# Altium PCB LEDArray8KeyRevB.PcbDoc (part 3 of 4)
Units mm, origin at the board's own origin, x right, y up, seen from the top; angles counter-clockwise.
Board outline 120 x 84.91 mm, 2 copper layers (Top Layer, Bottom Layer); 250 components, 219 nets, 891 pads, 234 vias.
Unrouted connection lines stored in the file: 34.
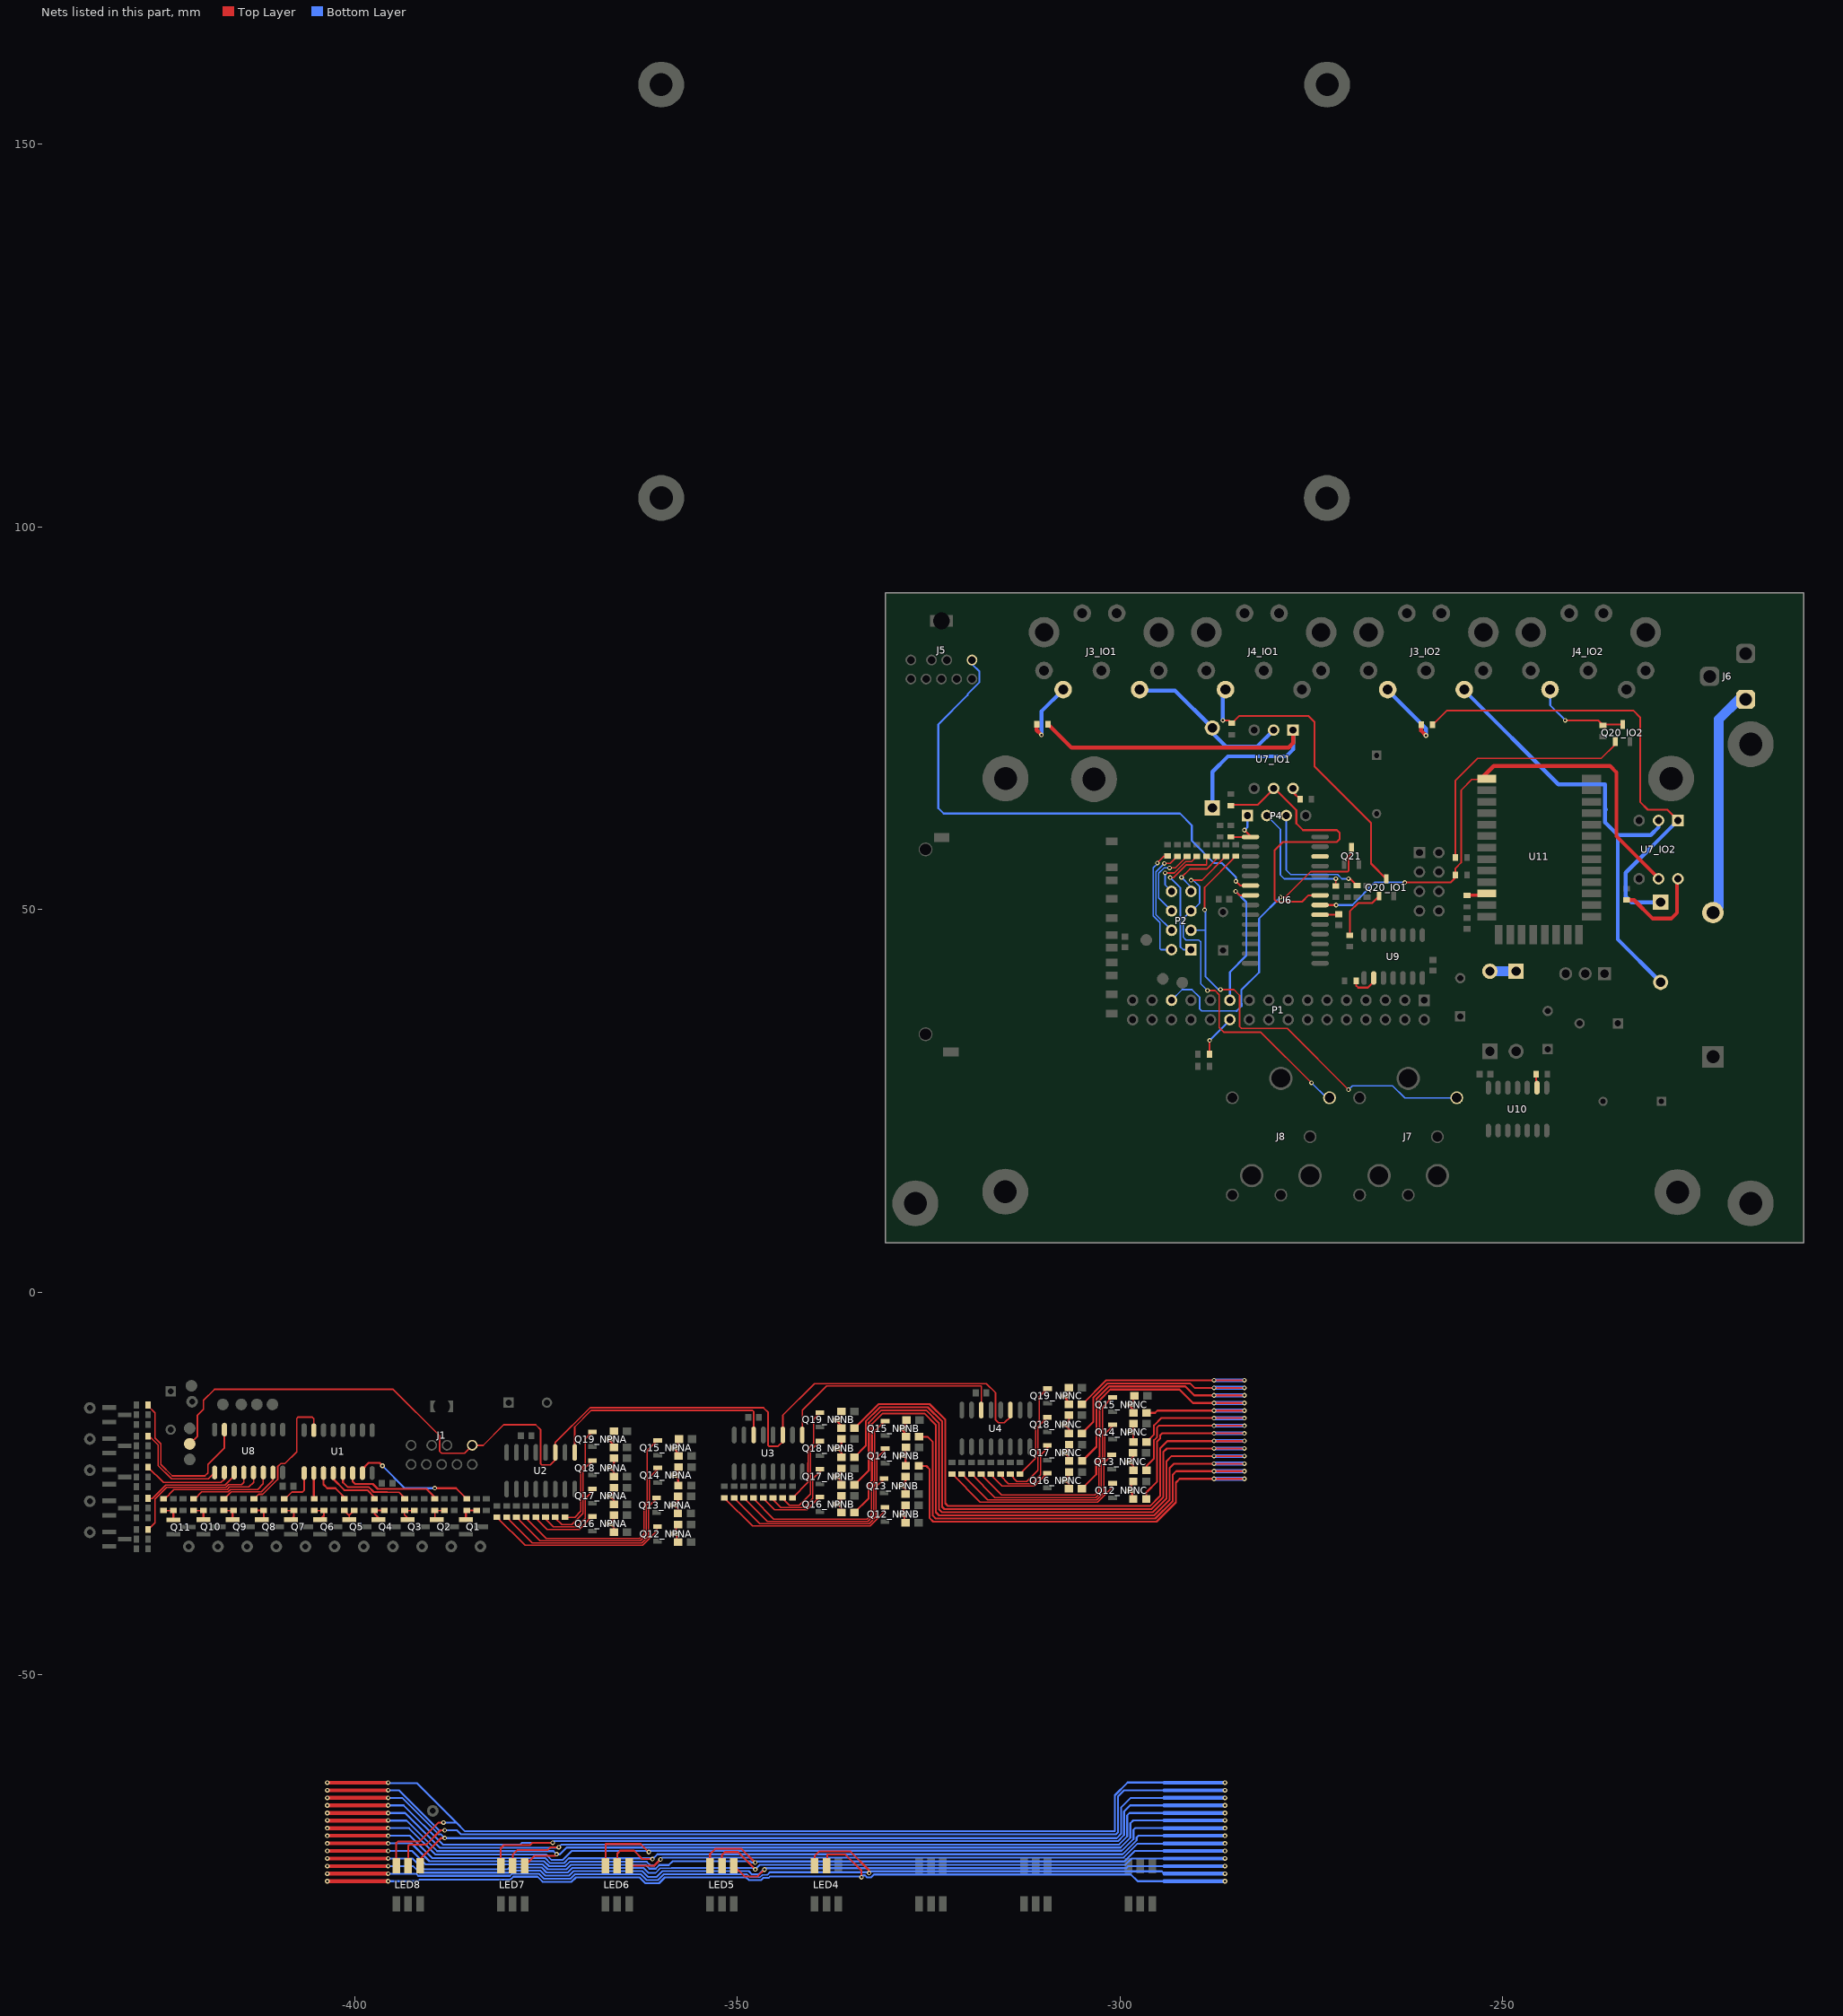
[diagram p3: the nets of this part, all layers, seen from the top]

## Via types
v1: diameter 0.6, hole 0.3, Top Layer to Bottom Layer, 234 vias

## Nets (pads, with @x,y where several pads share a name; then routed paths per layer and width w, separated by ;. In a path a pad name is that pad's centre, name@x,y a point inside that pad or via, vN(x,y) a via of type N, cw(c..) or ccw(c..) an arc to the next point about the centre after c; other vN are vias at no path point) (continued)
L11: LED4.4 R7_NPNB.1 | length 184.7
  Top Layer w0.254: LED4.4@-338.342,-74.93 -338.243,-74.831 -338.243,-73.474 -335.881,-73.474 -333.773,-75.582 v1(-333.773,-76.446) ; R7_NPNB.1@-326.275,-22.69 -326.311,-22.693 -325.293,-22.693 -324.857,-23.129 -324.857,-29.516 -324.41,-29.964 -295.215,-29.964 -292.703,-27.452 -292.703,-24.88 -292.195,-24.372 v1(-283.737,-24.372)
  Top Layer w0.5: v1(-403.561,-76.954) v1(-395.617,-76.954)
  Bottom Layer w0.254: v1(-395.617,-76.954) -391.735,-76.954 -391.507,-76.725 -379.611,-76.725 -379.255,-76.369 -376.087,-76.369 -375.43,-77.026 -371.639,-77.026 -371.059,-76.446 -362.753,-76.446 -361.995,-77.204 -360.21,-77.204 -359.452,-76.446 -348.841,-76.446 -348.485,-76.801 -346.868,-76.801 -346.563,-76.496 -346.26,-76.496 -346.235,-76.522 -345.898,-76.522 -345.695,-76.319 -333.9,-76.319 v1(-333.773,-76.446) -333.519,-76.192 -333.297,-76.192 -333.022,-76.466 -332.542,-76.466 -332.141,-76.065 -298.568,-76.065 -297.679,-76.954 -294.225,-76.954
  Bottom Layer w0.5: -294.225,-76.954 v1(-286.281,-76.954) ; v1(-287.709,-24.372) v1(-283.737,-24.372)
L12: LED4.2 R10_NPNB.1 | length 190.7
  Top Layer w0.254: LED4.2@-339.892,-74.93 -339.892,-73.649 -339.31,-73.067 -335.22,-73.067 -332.782,-75.505 v1(-332.782,-75.887) ; R10_NPNB.1@-326.319,-18.97 R10_NPNB.1@-326.319,-18.871 ; R10_NPNB.1@-326.264,-18.867 R10_NPNB.1@-326.319,-18.871 ; v1(-283.737,-23.381) -292.652,-23.381 -293.109,-23.838 -293.109,-27.283 -295.383,-29.557 -324.081,-29.557 -324.451,-29.188 -324.451,-19.571 -325.151,-18.871 R10_NPNB.1@-326.319,-18.871
  Top Layer w0.5: v1(-403.561,-75.963) v1(-395.617,-75.963)
  Bottom Layer w0.203: -349.419,-76.039 -348.709,-76.039 -348.328,-76.42 -347.026,-76.42 -346.721,-76.115 -346.066,-76.115
  Bottom Layer w0.254: v1(-395.617,-75.963) -391.954,-75.963 -391.675,-76.242 -379.703,-76.242 -379.424,-75.963 -375.918,-75.963 -375.262,-76.619 -371.808,-76.619 -371.227,-76.039 -362.585,-76.039 -361.827,-76.797 -360.378,-76.797 -359.62,-76.039 -349.419,-76.039 ; -346.066,-76.115 -345.736,-75.785 -332.884,-75.785 v1(-332.782,-75.887) -332.554,-75.658 -294.529,-75.658 -294.225,-75.963
  Bottom Layer w0.5: -294.225,-75.963 v1(-286.281,-75.963) ; v1(-287.709,-23.381) v1(-283.737,-23.381)
L13: LED5.6 R13_NPNB.1 | length 207.7
  Top Layer w0.254: LED5.6@-350.459,-74.93 -349.07,-76.319 -347.336,-76.319 v1(-346.447,-75.43) v1@-346.511,-75.366 ; R13_NPNB.1@-334.701,-28.78 -332.833,-26.913 -332.833,-25.018 -332.401,-24.586 -332.401,-17.222 -331.005,-15.825 -325.547,-15.825 -324.045,-17.328 -324.045,-28.745 -323.638,-29.151 -295.551,-29.151 -293.516,-27.115 -293.516,-22.975 -292.932,-22.391 v1(-283.737,-22.391)
  Top Layer w0.5: v1(-403.561,-74.972) v1(-395.617,-74.972)
  Bottom Layer w0.203: v1@-346.511,-75.366 v1@-346.393,-75.249
  Bottom Layer w0.254: v1(-395.617,-74.972) -392.37,-74.972 -391.507,-75.836 -379.871,-75.836 -379.592,-75.557 -375.75,-75.557 -375.094,-76.213 -371.976,-76.213 -371.396,-75.633 -362.417,-75.633 -361.659,-76.391 -360.547,-76.391 -359.789,-75.633 -348.504,-75.633 -348.098,-76.039 -347.184,-76.039 v1@-346.511,-75.366 ; v1@-346.393,-75.249 -299.177,-75.249 -298.901,-74.972 -294.225,-74.972
  Bottom Layer w0.5: -294.225,-74.972 v1(-286.281,-74.972) ; v1(-287.709,-22.391) v1(-283.737,-22.391)
L14: LED5.4 R16_NPNB.1 | length 207.1
  Top Layer w0.254: LED5.4@-352.009,-74.93 -352.009,-73.549 -351.603,-73.144 -350.232,-73.144 ; -350.232,-73.144 -349.901,-73.144 v1(-347.642,-75.404) ; R16_NPNB.1@-334.683,-25.163 -332.808,-23.288 -332.808,-17.054 -331.173,-15.419 -325.328,-15.419 -323.638,-17.108 -323.638,-28.364 -323.257,-28.744 -295.72,-28.744 -293.922,-26.947 -293.922,-22.086 -293.236,-21.4 v1(-283.737,-21.4)
  Top Layer w0.5: v1(-403.561,-73.982) v1(-395.617,-73.982)
  Bottom Layer w0.203: -361.613,-75.861 -360.661,-75.861 -360.051,-75.252 -358.614,-75.252 -358.589,-75.226
  Bottom Layer w0.254: v1(-395.617,-73.982) -392.417,-73.982 -390.999,-75.4 -380.01,-75.4 -379.76,-75.15 -375.582,-75.15 -374.925,-75.807 -372.144,-75.807 -371.564,-75.226 -362.248,-75.226 -361.613,-75.861 ; -358.589,-75.226 -347.819,-75.226 v1(-347.642,-75.404) -347.032,-74.795 -299.298,-74.795 -298.485,-73.982 -294.225,-73.982
  Bottom Layer w0.5: -294.225,-73.982 v1(-286.281,-73.982) ; v1(-287.709,-21.4) v1(-283.737,-21.4)
L15: LED5.2 R19_NPNB.1 | length 206.6
  Top Layer w0.254: LED5.2@-353.559,-74.93 -353.559,-73.397 -352.873,-72.712 -349.47,-72.712 v1(-347.667,-74.515) ; R19_NPNB.1@-334.701,-21.541 -333.214,-20.055 -333.214,-16.885 -331.341,-15.013 -325.099,-15.013 -323.232,-16.88 -323.232,-28.045 -322.938,-28.338 -295.888,-28.338 -294.329,-26.778 -294.329,-20.867 -293.871,-20.409 v1(-283.737,-20.409)
  Top Layer w0.5: v1(-403.561,-72.991) v1(-395.617,-72.991)
  Bottom Layer w0.254: v1(-395.617,-72.991) -392.497,-72.991 -390.745,-74.744 -375.413,-74.744 -374.757,-75.4 -372.313,-75.4 -371.732,-74.82 -361.982,-74.82 -361.494,-75.309 -360.661,-75.309 -360.198,-74.845 -358.944,-74.845 -358.436,-74.337 -348.276,-74.337 -348.098,-74.515 v1(-347.667,-74.515) -347.514,-74.363 -299.44,-74.363 -298.069,-72.991 -294.225,-72.991
  Bottom Layer w0.5: -294.225,-72.991 v1(-286.281,-72.991) ; v1(-287.709,-20.409) v1(-283.737,-20.409)
L16: LED6.6 R22_NPNB.1 | length 200.1
  Top Layer w0.254: LED6.6@-364.007,-75.049 LED6.6@-364.126,-74.93 -360.858,-74.93 v1(-360.036,-74.109) ; R22_NPNB.1@-334.701,-17.746 -334.701,-17.758 -334.662,-17.758 -331.51,-14.606 -324.87,-14.606 -322.825,-16.651 -322.825,-27.573 -322.467,-27.932 -296.056,-27.932 -294.735,-26.61 -294.735,-20.384 -293.808,-19.457 v1@-283.737,-19.457
  Top Layer w0.5: v1(-403.561,-72.001) v1(-395.617,-72.001)
  Bottom Layer w0.254: v1(-395.617,-72.001) -392.573,-72.001 -390.237,-74.337 -375.245,-74.337 -374.589,-74.994 -372.481,-74.994 -371.901,-74.414 -361.814,-74.414 -361.325,-74.902 -360.83,-74.902 v1(-360.036,-74.109) -359.782,-73.855 -299.507,-73.855 -297.691,-72.039 -294.225,-72.039
  Bottom Layer w0.5: -294.225,-72.039 v1@-286.281,-72.039 ; v1(-287.709,-19.419) v1(-283.737,-19.419)
  other v1: -286.281,-72.001
L17: LED6.4 R1_NPNC.1 | length 151.5
  Top Layer w0.254: LED6.4@-365.676,-74.93 -365.676,-73.347 -365.295,-72.966 -363.491,-72.966 -362.399,-74.058 v1(-361.078,-74.058) v1@-361.179,-73.956 ; R1_NPNC.1@-296.562,-26.992 -296.562,-26.151 -295.141,-24.731 -295.141,-19.486 -294.735,-19.079 -294.735,-18.688 -294.475,-18.428 v1(-283.737,-18.428)
  Top Layer w0.5: v1(-403.561,-71.01) v1(-395.617,-71.01)
  Bottom Layer w0.254: v1(-395.617,-71.01) -392.777,-71.01 -389.856,-73.931 -375.077,-73.931 -374.42,-74.587 -372.649,-74.587 -372.018,-73.956 v1@-361.179,-73.956 ; v1(-361.078,-74.058) -360.443,-73.423 -299.65,-73.423 -297.831,-71.604 -297.831,-71.239 -297.603,-71.01 -294.225,-71.01
  Bottom Layer w0.5: -294.225,-71.01 v1(-286.281,-71.01) ; v1(-287.709,-18.428) v1(-283.737,-18.428)
L18: LED6.2 R4_NPNC.1 | length 151.9
  Top Layer w0.254: LED6.2@-367.226,-74.93 -367.199,-74.903 -367.199,-72.077 -362.652,-72.077 -361.585,-73.144 v1(-361.56,-73.144) ; R4_NPNC.1@-296.55,-23.233 -296.55,-22.707 -295.548,-21.705 -295.548,-19.317 -295.141,-18.911 -295.141,-17.641 -294.936,-17.436 v1(-283.737,-17.438)
  Top Layer w0.5: v1(-403.561,-70.019) v1(-395.617,-70.019)
  Bottom Layer w0.254: v1(-395.617,-70.019) -392.904,-70.019 -389.475,-73.448 -374.985,-73.448 -374.252,-74.181 -372.818,-74.181 -371.628,-72.991 v1@-361.738,-72.991 ; v1(-361.56,-73.144) -361.383,-72.966 -299.768,-72.966 -298.238,-71.436 -298.238,-70.223 -298.035,-70.019 -294.225,-70.019
  Bottom Layer w0.5: -294.225,-70.019 v1(-286.281,-70.019) ; v1(-287.709,-17.438) v1(-283.737,-17.438)
L19: LED7.6 R7_NPNC.1 | length 145.7
  Top Layer w0.254: LED7.6@-377.793,-74.93 -376.514,-73.652 -373.828,-73.652 v1(-373.6,-73.423) ; R7_NPNC.1@-296.536,-19.576 -296.58,-19.587 -295.548,-18.555 -295.548,-17.387 -294.581,-16.42 ; -294.581,-16.433 v1@-283.737,-16.433
  Top Layer w0.5: v1@-403.561,-69.029 v1@-395.617,-69.029
  Bottom Layer w0.254: v1(-395.617,-69.003) -395.617,-69.029 -393.208,-69.029 -389.221,-73.017 -374.006,-73.017 v1(-373.6,-73.423) -373.168,-73.423 -372.305,-72.559 -299.936,-72.559 -298.644,-71.267 -298.644,-69.384 -298.263,-69.003 -294.225,-69.003
  Bottom Layer w0.5: -294.225,-69.003 v1(-286.281,-69.003) ; v1@-287.709,-16.461 v1@-283.737,-16.461
  other v1: -403.561,-69.003 -287.709,-16.447 -283.737,-16.447
L20: LED7.4 R10_NPNC.1 | length 147.6
  Top Layer w0.254: LED7.4@-379.343,-74.93 -379.343,-73.502 -378.705,-72.864 -374.743,-72.864 -374.387,-72.509 v1(-373.321,-72.509) v1@-373.397,-72.585 ; R10_NPNC.1@-296.58,-15.856 R10_NPNC.1@-296.58,-15.757 ; R10_NPNC.1@-296.525,-15.753 R10_NPNC.1@-296.58,-15.757 ; v1(-283.737,-15.456) -295.109,-15.455 -295.412,-15.757 R10_NPNC.1@-296.58,-15.757
  Top Layer w0.5: v1(-403.561,-68.038) v1(-395.617,-68.038)
  Bottom Layer w0.254: v1(-395.617,-68.038) -393.386,-68.038 -388.84,-72.585 v1@-373.397,-72.585 ; v1(-373.321,-72.509) -372.965,-72.153 -300.104,-72.153 -299.051,-71.099 -299.051,-68.343 -298.746,-68.038 -294.225,-68.038
  Bottom Layer w0.5: -294.225,-68.038 v1(-286.281,-68.038) ; v1(-287.709,-15.456) v1(-283.737,-15.456)
L21: LED7.2 R13_NPNC.1 | length 169.5
  Top Layer w0.254: -380.915,-72.61 -380.893,-72.632 ; LED7.2@-380.893,-74.93 -380.893,-72.632 ; v1(-374.108,-71.924) -376.739,-71.924 -377.054,-72.24 -380.5,-72.24 -380.893,-72.632 ; R13_NPNC.1@-304.962,-25.666 -303.094,-23.799 -303.094,-21.904 -302.662,-21.472 -302.662,-14.108 -301.266,-12.711 -292.222,-12.711 -290.468,-14.466 v1(-283.737,-14.466)
  Top Layer w0.5: v1(-403.561,-67.048) v1(-395.617,-67.048)
  Bottom Layer w0.254: v1(-395.617,-67.048) -393.589,-67.048 -388.459,-72.178 -378.375,-72.178 -378.121,-71.924 v1(-374.108,-71.924) -373.905,-71.721 -300.247,-71.721 -299.457,-70.931 -299.457,-67.835 -298.67,-67.048 -294.225,-67.048
  Bottom Layer w0.5: -294.225,-67.048 v1(-286.281,-67.048) ; v1(-287.709,-14.466) v1(-283.737,-14.466)
L22: LED8.6 R16_NPNC.1 | length 162.2
  Top Layer w0.254: LED8.6@-391.46,-74.93 -391.46,-74.062 -388.713,-71.315 v1(-388.23,-71.315) ; R16_NPNC.1@-304.944,-22.049 -303.069,-20.174 -303.069,-13.94 -301.434,-12.305 -291.465,-12.305 -290.295,-13.475 v1(-283.737,-13.475)
  Top Layer w0.5: v1(-403.561,-66.057) v1(-395.617,-66.057)
  Bottom Layer w0.254: v1(-395.617,-66.057) -393.793,-66.057 -389.043,-70.807 -388.738,-70.807 v1(-388.23,-71.315) -300.416,-71.315 -299.863,-70.762 -299.863,-67.327 -298.593,-66.057 -294.225,-66.057
  Bottom Layer w0.5: -294.225,-66.057 v1(-286.281,-66.057) ; v1(-287.709,-13.475) v1(-283.737,-13.475)
L23: LED8.4 R19_NPNC.1 | length 163
  Top Layer w0.254: LED8.4@-393.01,-74.93 -393.005,-74.926 -393.005,-72.356 -392.802,-72.153 -390.618,-72.153 -388.763,-70.299 v1(-388.23,-70.299) ; R19_NPNC.1@-304.962,-18.427 -303.475,-16.941 -303.475,-13.771 -301.602,-11.899 -290.83,-11.899 -290.244,-12.485 v1(-283.737,-12.485)
  Top Layer w0.5: v1(-403.561,-65.066) v1(-395.617,-65.066)
  Bottom Layer w0.254: v1(-395.617,-65.066) -394.208,-65.066 -388.976,-70.299 v1(-388.23,-70.299) -386.63,-70.299 -386.097,-70.832 -300.508,-70.832 -300.27,-70.594 -300.27,-65.895 -299.441,-65.066 -294.225,-65.066
  Bottom Layer w0.5: -294.225,-65.066 v1(-286.281,-65.066) ; v1(-287.709,-12.485) v1(-283.737,-12.485)
L24: LED8.2 R22_NPNC.1 | length 163.8
  Top Layer w0.254: LED8.2@-394.56,-74.93 -394.56,-72.006 -394.301,-71.747 -391.506,-71.747 -389.042,-69.283 v1(-388.383,-69.283) ; R22_NPNC.1@-304.962,-14.622 -304.962,-14.644 -304.923,-14.644 -301.771,-11.492 v1(-283.737,-11.494)
  Top Layer w0.5: v1(-403.561,-64.076) v1(-395.617,-64.076)
  Bottom Layer w0.254: v1(-395.617,-64.076) -395.617,-64.127 -391.862,-64.127 -386.706,-69.283 ; v1(-388.383,-69.283) -386.706,-69.283 ; -294.225,-64.076 -294.25,-64.05 -299,-64.05 -300.676,-65.727 -300.676,-70.426 -385.563,-70.426 -386.706,-69.283
  Bottom Layer w0.5: -294.225,-64.076 v1(-286.281,-64.076) ; v1(-287.709,-11.494) v1(-283.737,-11.494)
L_OUT: U6.26
LAT: J1.6 J5.6 pad.0@-421.538,-19.812 U2.11 U3.11 U4.11 U6.6 | length 211.8
  Top Layer w0.203: pad.0@-421.538,-19.812 -420.522,-18.796 -420.522,-16.047 -419.754,-15.278 -419.754,-14.129 -418.313,-12.688 -394.954,-12.688 -388.863,-18.779 -388.872,-18.788 -388.872,-19.595 -388.876,-19.599 -388.876,-20.784 -388.637,-21.023 -385.647,-21.023 J1.6@-384.622,-19.998 -383.192,-19.998 -380.509,-17.314 -376.343,-17.314 -375.683,-17.975 -375.683,-22.42 -375.556,-22.547 -374.413,-22.547 -373.778,-21.912 U2.11@-373.778,-20.919 -373.778,-19.631 -369.226,-15.079 -346.574,-15.079 -345.965,-15.689 -345.965,-20.007 -345.838,-20.134 -344.695,-20.134 -344.049,-19.488 U3.11@-344.049,-18.647 -344.049,-16.059 -339.92,-11.93 -317.462,-11.93 -316.247,-13.145 -316.247,-16.705 -315.894,-17.057 -315.104,-17.057 -314.313,-16.267 U4.11@-314.313,-15.381
  Top Layer w0.254: v1(-284.852,53.704) -284.294,53.145 U6.6@-282.951,53.145
  Bottom Layer w0.254: J5.6@-319.329,82.618 -319.33,82.077 -318.35,81.098 -318.35,79.713 -319.902,78.16 -319.902,78.037 -323.74,74.2 -323.74,63.247 -323.044,62.551 -292.156,62.551 -290.618,61.013 -290.618,59.013 -287.672,56.066 -286.656,56.066 -284.852,54.263 v1(-284.852,53.704)
LCD_WR: P1.21 U6.7 | length 17.8
  Top Layer w0.254: v1(-284.878,52.383) -284.37,51.875 U6.7@-282.951,51.875
  Bottom Layer w0.254: P1.21@-285.64,38.159 -285.64,41.842 -283.481,44.001 -283.481,50.986 v1(-284.878,52.383)
MCLR: P4.1 R58.1 U6.1 | length 5.8
  Top Layer w0.254: R58.1@-285.513,59.507 -285.501,59.495 U6.1@-282.951,59.495 -282.951,59.6 v1(-283.735,60.384)
  Bottom Layer w0.254: v1(-283.735,60.384) -283.354,60.765 P4.1@-283.354,62.289
NetC9_2: C9.2 U6.20 | length 2.5
  Top Layer w0.254: U6.20@-273.851,49.335 -271.481,49.335 C9.2@-271.416,49.4
NetD1_2: D1.2 D2.1 | length 3.4
  Bottom Layer w1.27: D2.1@-251.669,41.95 D1.2@-248.24,41.95
NetD3_IO1_1: D3_IO1.1 J3_IO1.5 U7_IO1.2 | length 22.1
  Bottom Layer w0.508: J3_IO1.5@-297.422,78.745 -297.549,78.618 -292.802,78.618 D3_IO1.1@-287.926,73.742 -287.926,73.084 -286.148,71.306 -282.084,71.306 U7_IO1.2@-279.925,73.465
NetD3_IO1_2: D3_IO1.2 R63_IO1.2 U7_IO1.1 | length 54.2
  Top Layer w0.508: R63_IO1.2@-309.386,74.227 -306.338,71.179 -277.963,71.179 -277.385,71.758 U7_IO1.1@-277.385,73.465
  Bottom Layer w0.508: D3_IO1.2@-287.926,63.282 -287.926,68.004 -285.894,70.036 -278.274,70.036 -277.385,70.925 U7_IO1.1@-277.385,73.465
NetD3_IO2_1: D3_IO2.1 J3_IO2.5 U7_IO2.2 | length 59
  Bottom Layer w0.508: J3_IO2.5@-254.992,78.64 -242.729,66.376 -236.618,66.376 -236.618,63.201 -236.491,63.074 ; -236.618,63.074 -236.618,61.4 -234.967,59.749 ; U7_IO2.2@-229.633,61.654 -229.633,60.765 -230.649,59.749 -234.967,59.749 ; D3_IO2.1@-229.362,40.508 -234.967,46.112 -234.967,59.749
NetD3_IO2_2: D3_IO2.2 R63_IO2.2 U7_IO2.1 | length 62.9
  Top Layer w0.254: R63_IO2.2@-259.141,74.154 -257.272,76.024 -232.935,76.024 -232.046,75.135 -232.046,64.067 -231.03,63.051 -228.49,63.051 U7_IO2.1@-227.093,61.654
  Bottom Layer w0.508: D3_IO2.2@-229.362,50.968 -233.162,50.968 -233.934,51.74 -233.934,54.813 U7_IO2.1@-227.093,61.654
NetD5_1: D5.1 J6.1 | length 30.2
  Bottom Layer w1.27: D5.1@-222.521,49.611 -221.759,50.373 -221.759,74.862 -219.145,77.476 J6.1@-218.253,77.476
NetJ3_IO1_4: J3_IO1.4 R63_IO1.1 | length 8.7
  Top Layer w0.508: R63_IO1.1@-310.887,74.227 -310.887,73.453 v1(-310.263,72.83)
  Bottom Layer w0.508: v1(-310.263,72.83) -310.263,75.904 J3_IO1.4@-307.422,78.745
NetJ3_IO2_4: J3_IO2.4 R63_IO2.1 | length 9.7
  Top Layer w0.508: R63_IO2.1@-260.641,74.154 -260.641,73.38 v1(-260.018,72.757)
  Bottom Layer w0.508: J3_IO2.4@-265.019,78.745 -264.993,78.64 -260.018,73.666 v1(-260.018,72.757)
NetJ4_IO1_4: J4_IO1.4 Q20_IO1.1 R64_IO1.1 | length 41.4
  Top Layer w0.254: v1(-286.554,74.735) -285.779,74.735 R64_IO1.1@-285.386,74.342 -284.405,75.323 -275.405,75.323 -274.563,74.481 -274.563,68.677 -267.199,61.313 -267.199,56.023 Q20_IO1.1@-265.193,54.016
  Bottom Layer w0.508: v1(-286.554,74.735) -286.554,78.404 J4_IO1.4@-286.213,78.745
NetJ4_IO2_4: J4_IO2.4 Q20_IO2.1 R64_IO2.1 | length 13
  Top Layer w0.254: v1(-241.825,74.735) -237.531,74.735 R64_IO2.1@-236.884,74.088 -236.763,74.209 Q20_IO2.1@-234.332,74.209
  Bottom Layer w0.254: J4_IO2.4@-244.085,78.339 -243.784,78.64 -243.784,76.694 v1(-241.825,74.735)
NetJ7_TIP: J7.TIP P2.3 R66.1 | length 62.2
  Top Layer w0.203: v1(-288.942,49.97) -288.942,52.901 R66.1@-284.856,56.987 ; v1(-286.861,39.56) -285.136,39.56 -284.37,38.794 -284.37,34.73 -284.116,34.476 -278.147,34.476 v1(-270.146,26.475)
  Bottom Layer w0.203: P2.3@-290.72,47.303 -288.815,47.303 ; v1(-288.942,49.97) -288.815,49.843 -288.815,47.303 ; v1(-286.861,39.56) -287.168,39.56 -288.815,41.207 -288.815,47.303 ; v1(-270.146,26.475) -269.638,26.983 -264.38,26.983 -262.78,25.383 J7.TIP@-255.414,25.383
NetJ8_TIP: J8.TIP P2.5 R67.1 | length 49
  Top Layer w0.203: v1(-290.703,53.848) -289.267,53.848 R67.1@-286.148,56.967 ; v1(-288.561,39.429) -287.574,39.429 -287.037,38.892 -287.037,34.603 -286.402,33.968 -281.576,33.968 v1(-274.972,27.364)
  Bottom Layer w0.203: v1(-290.703,53.848) -290.432,53.848 -289.577,52.993 -289.577,50.859 -290.593,49.843 P2.5@-290.72,49.843 -291.736,48.827 -291.736,46.414 -291.355,46.033 -289.704,46.033 -289.45,45.779 -289.45,40.318 v1(-288.561,39.429) ; v1(-274.972,27.364) -272.991,25.383 J8.TIP@-272.051,25.383
NetP1_27: P1.27 Q21.1 | length 42.1
  Top Layer w0.203: v1(-279.036,51.621) -278.432,51.621 -275.084,54.969 -270.201,54.969 -270.129,55.041 -270.129,56.957 -269.748,57.338 Q21.1@-269.748,58.116
  Top Layer w0.254: v1(-279.036,51.621) v1@-279.036,51.748
  Bottom Layer w0.203: P1.27@-293.26,38.159 -291.868,39.551 -290.593,39.551 -289.577,38.535 -289.577,37.016 -289.323,36.762 -284.751,36.762
  Bottom Layer w0.254: -284.751,36.762 -284.116,37.397 -284.116,37.719 -284.129,37.733 -284.129,39.504 -281.83,41.803 -281.83,48.827 v1(-279.036,51.621)
NetP2_1: P2.1 R68.2 | length 17.7
  Top Layer w0.203: v1(-293.438,54.187) -293.011,54.187 -291.362,55.835 -288.688,55.835 R68.2@-288.688,56.979
  Bottom Layer w0.203: v1(-293.438,54.187) -292.269,53.018 -292.244,53.018 -292.117,52.891 -292.117,45.144 -291.736,44.763 P2.1@-290.72,44.763
NetP2_2: P2.2 R70.2 | length 15.2
  Top Layer w0.203: v1@-295.038,56.066 v1(-295.114,56.092) -294.238,56.967 -293.768,56.967 R70.2@-293.768,56.993
  Bottom Layer w0.203: v1@-295.038,56.066 -295.647,55.457 -295.647,49.188 -294.784,48.324 -294.784,44.89 -294.657,44.763 P2.2@-293.26,44.763
NetP2_4: P2.4 R71.2 | length 12.1
  Top Layer w0.203: v1(-294.2,56.041) -293.436,56.041 R71.2@-292.498,56.979
  Bottom Layer w0.203: v1(-294.2,56.041) -295.292,54.949 -295.292,49.335 P2.4@-293.26,47.303
NetP2_6: P2.6 R72.2 | length 10.2
  Top Layer w0.203: v1(-293.514,55.457) -292.75,55.457 R72.2@-291.228,56.979
  Bottom Layer w0.203: v1(-293.514,55.457) -294.225,55.457 -294.936,54.745 -294.936,51.52 P2.6@-293.26,49.843
NetP2_7: P2.7 R69.1 | length 8.3
  Top Layer w0.203: v1(-291.964,54.212) -290.872,55.304 -288.688,55.304 -287.418,56.574 R69.1@-287.418,56.979
  Bottom Layer w0.203: v1(-291.964,54.212) -290.72,52.967 P2.7@-290.72,52.383
NetP2_8: P2.8 R73.2 | length 7.8
  Top Layer w0.203: v1(-294.098,54.796) -292.904,54.796 -291.406,56.295 -290.642,56.295 R73.2@-289.958,56.979
  Bottom Layer w0.203: v1(-294.098,54.796) -294.098,53.221 P2.8@-293.26,52.383
NetQ1_1: Q1.1 R25.2 R36.2 | length 2.5
  Top Layer w0.254: Q1.1@-385.446,-29.699 -385.446,-28.615 R25.2@-385.335,-28.504 R36.2@-384.065,-28.504
NetQ2_1: Q2.1 R26.2 R37.2 | length 2.6
  Top Layer w0.152: Q2.1@-389.256,-29.699 -389.526,-29.43 R26.2@-389.526,-28.504 R37.2@-388.256,-28.504
NetQ3_1: Q3.1 R27.2 R38.2 | length 2.6
  Top Layer w0.152: Q3.1@-393.066,-29.699 -393.066,-29.445 -393.463,-29.049 R27.2@-393.463,-28.504 R38.2@-392.193,-28.504
NetQ4_1: Q4.1 R28.2 R39.2 | length 2.7
  Top Layer w0.254: Q4.1@-396.876,-29.699 -396.876,-29.445 -397.4,-28.922 R28.2@-397.4,-28.504 R39.2@-396.13,-28.504
NetQ5_1: Q5.1 R29.2 R40.2 | length 2.4
  Top Layer w0.152: R29.2@-401.337,-28.504 -400.686,-29.155 ; Q5.1@-400.686,-29.699 -400.686,-29.155 ; R40.2@-400.067,-28.504 -400.686,-29.123 -400.686,-29.155
NetQ6_1: Q6.1 R30.2 R41.2 | length 2.7
  Top Layer w0.152: R30.2@-405.274,-28.504 R41.2@-404.004,-28.504
  Top Layer w0.254: Q6.1@-404.496,-29.699 -404.004,-29.207 R41.2@-404.004,-28.504
NetQ7_1: Q7.1 R31.2 R42.2 | length 2.6
  Top Layer w0.152: R31.2@-409.211,-28.504 R42.2@-407.941,-28.504
  Top Layer w0.254: Q7.1@-408.306,-29.699 -407.941,-29.334 R42.2@-407.941,-28.504
NetQ8_1: Q8.1 R32.2 R43.2 | length 2.6
  Top Layer w0.254: R32.2@-413.148,-28.504 R43.2@-411.878,-28.504 -411.878,-29.461 Q8.1@-412.116,-29.699
NetQ9_1: Q9.1 R33.2 R44.2 | length 2.5
  Top Layer w0.152: R33.2@-417.085,-28.504 R44.2@-415.815,-28.504
  Top Layer w0.254: Q9.1@-415.926,-29.699 -415.926,-28.615 R44.2@-415.815,-28.504
NetQ10_1: Q10.1 R34.2 R45.2 | length 2.5
  Top Layer w0.152: R34.2@-421.022,-28.504 R45.2@-419.752,-28.504
  Top Layer w0.254: R45.2@-419.752,-28.504 -419.736,-28.52 Q10.1@-419.736,-29.699
NetQ11_1: Q11.1 R35.2 R46.2 | length 2.5
  Top Layer w0.152: R35.2@-424.959,-28.504 R46.2@-423.689,-28.504
  Top Layer w0.254: R46.2@-423.689,-28.504 -423.673,-28.52 Q11.1@-423.673,-29.725
NetQ12_NPNA_1: Q12_NPNA.1 R1_NPNA.2 R2_NPNA.2 | length 2.6
  Top Layer w0.254: R2_NPNA.2@-357.991,-30.294 -357.991,-31.38 Q12_NPNA.1@-358.175,-31.564 -357.864,-31.875 R1_NPNA.2@-357.864,-32.707
NetQ12_NPNA_2: Q12_NPNA.2 R3_NPNA.2 | length 24
  Top Layer w0.152: R3_NPNA.2@-381.398,-29.403 -377.727,-33.075 -362.377,-33.075 -360.475,-31.172 -360.475,-30.564 -360.425,-30.514 Q12_NPNA.2@-360.425,-30.614
NetQ12_NPNB_1: Q12_NPNB.1 R1_NPNB.2 R2_NPNB.2 | length 2.6
  Top Layer w0.254: R2_NPNB.2@-328.273,-27.754 -328.273,-28.84 Q12_NPNB.1@-328.457,-29.024 -328.146,-29.335 R1_NPNB.2@-328.146,-30.167
NetQ12_NPNB_2: Q12_NPNB.2 R3_NPNB.2 | length 24
  Top Layer w0.152: R3_NPNB.2@-351.68,-26.863 -348.009,-30.535 -332.659,-30.535 -330.757,-28.632 -330.757,-28.024 -330.707,-27.974 Q12_NPNB.2@-330.707,-28.074
NetQ12_NPNC_1: Q12_NPNC.1 R1_NPNC.2 R2_NPNC.2 | length 2.6
  Top Layer w0.254: R2_NPNC.2@-298.534,-24.64 -298.534,-25.726 Q12_NPNC.1@-298.718,-25.91 -298.407,-26.221 R1_NPNC.2@-298.407,-27.053
NetQ12_NPNC_2: Q12_NPNC.2 R3_NPNC.2 | length 24
  Top Layer w0.152: R3_NPNC.2@-321.941,-23.75 -318.27,-27.421 -302.921,-27.421 -301.018,-25.518 -301.018,-24.91 -300.968,-24.86 Q12_NPNC.2@-300.968,-24.96
NetQ13_NPNA_1: Q13_NPNA.1 R4_NPNA.2 R5_NPNA.2 | length 3
  Top Layer w0.254: R4_NPNA.2@-357.758,-29.09 -357.758,-28.897 R4_NPNA.2@-357.758,-28.639 ; R4_NPNA.2@-357.737,-28.836 -357.737,-28.319 -358.26,-27.796 -358.302,-27.754 -357.737,-27.189 R5_NPNA.2@-357.737,-26.738
NetQ13_NPNA_2: Q13_NPNA.2 R6_NPNA.2 | length 25.9
  Top Layer w0.152: R6_NPNA.2@-380.128,-29.403 -376.761,-32.77 -362.504,-32.77 -361.586,-31.852 -361.586,-27.992 -360.499,-26.905 -360.425,-26.831 Q13_NPNA.2@-360.534,-26.87
NetQ13_NPNB_1: Q13_NPNB.1 R4_NPNB.2 R5_NPNB.2 | length 3.2
  Top Layer w0.254: R4_NPNB.2@-328.04,-26.55 -328.04,-26.357 -328.04,-26.099 -328.019,-26.296 -328.019,-25.779 -328.542,-25.256 -328.584,-25.214 -328.019,-24.649 R5_NPNB.2@-328.019,-24.198
NetQ13_NPNB_2: Q13_NPNB.2 R6_NPNB.2 | length 25.9
  Top Layer w0.152: R6_NPNB.2@-350.41,-26.863 -347.043,-30.23 -332.786,-30.23 -331.868,-29.312 -331.868,-25.452 -330.781,-24.365 -330.707,-24.291 Q13_NPNB.2@-330.816,-24.33
NetQ13_NPNC_1: Q13_NPNC.1 R4_NPNC.2 R5_NPNC.2 | length 2.6
  Top Layer w0.254: R5_NPNC.2@-298.28,-21.084 -298.28,-21.535 -298.845,-22.1 -298.28,-22.665 -298.28,-23.182 R4_NPNC.2@-298.25,-23.233
NetQ13_NPNC_2: Q13_NPNC.2 R6_NPNC.2 | length 25.9
  Top Layer w0.152: R6_NPNC.2@-320.671,-23.75 -317.304,-27.116 -303.047,-27.116 -302.129,-26.198 -302.129,-22.338 -301.042,-21.251 -300.968,-21.177 Q13_NPNC.2@-301.077,-21.216
NetQ14_NPNA_1: Q14_NPNA.1 R7_NPNA.2 R8_NPNA.2 | length 2.4
  Top Layer w0.254: R8_NPNA.2@-357.737,-23.055 -357.737,-25.341 R7_NPNA.2@-357.693,-25.23
NetQ14_NPNA_2: Q14_NPNA.2 R9_NPNA.2 | length 27.7
  Top Layer w0.152: R9_NPNA.2@-378.858,-29.403 -375.796,-32.465 -362.63,-32.465 -361.891,-31.726 -361.891,-27.832 -361.459,-27.4 -361.459,-24.182 Q14_NPNA.2@-360.425,-23.148
NetQ14_NPNB_1: Q14_NPNB.1 R7_NPNB.2 R8_NPNB.2 | length 2.4
  Top Layer w0.254: R8_NPNB.2@-328.019,-20.515 -328.019,-22.801 R7_NPNB.2@-327.975,-22.69
NetQ14_NPNB_2: Q14_NPNB.2 R9_NPNB.2 | length 27.7
  Top Layer w0.152: R9_NPNB.2@-349.14,-26.863 -346.078,-29.925 -332.912,-29.925 -332.173,-29.186 -332.173,-25.292 -331.741,-24.86 -331.741,-21.642 Q14_NPNB.2@-330.707,-20.608
NetQ14_NPNC_1: Q14_NPNC.1 R7_NPNC.2 R8_NPNC.2 | length 2.4
  Top Layer w0.254: R8_NPNC.2@-298.28,-17.401 -298.28,-19.687 R7_NPNC.2@-298.236,-19.576
NetQ14_NPNC_2: Q14_NPNC.2 R9_NPNC.2 | length 27.7
  Top Layer w0.152: R9_NPNC.2@-319.401,-23.75 -316.339,-26.811 -303.173,-26.811 -302.434,-26.072 -302.434,-22.178 -302.002,-21.746 -302.002,-18.528 Q14_NPNC.2@-300.968,-17.494
NetQ15_NPNA_1: Q15_NPNA.1 R10_NPNA.2 R11_NPNA.2 | length 2.6
  Top Layer w0.254: R10_NPNA.2@-357.737,-21.658 -357.737,-20.953 -358.175,-20.515 -357.737,-20.077 R11_NPNA.2@-357.737,-19.372
NetQ15_NPNA_2: Q15_NPNA.2 R12_NPNA.2 | length 29.9
  Top Layer w0.152: R12_NPNA.2@-377.588,-29.403 -377.588,-29.507 -374.934,-32.16 -362.756,-32.16 -362.195,-31.599 -362.195,-27.705 -361.764,-27.274 -361.764,-20.677 -360.435,-19.348 -360.425,-19.338 Q15_NPNA.2@-360.407,-19.377
NetQ15_NPNB_1: Q15_NPNB.1 R10_NPNB.2 R11_NPNB.2 | length 2.6
  Top Layer w0.254: R10_NPNB.2@-328.019,-19.118 -328.019,-18.413 -328.457,-17.975 -328.019,-17.537 R11_NPNB.2@-328.019,-16.832
NetQ15_NPNB_2: Q15_NPNB.2 R12_NPNB.2 | length 29.9
  Top Layer w0.152: R12_NPNB.2@-347.87,-26.863 -347.87,-26.967 -345.216,-29.62 -333.038,-29.62 -332.477,-29.059 -332.477,-25.165 -332.046,-24.734 -332.046,-18.137 -330.717,-16.808 -330.707,-16.798 Q15_NPNB.2@-330.689,-16.837
NetQ15_NPNC_1: Q15_NPNC.1 R10_NPNC.2 R11_NPNC.2 | length 2.6
  Top Layer w0.254: R10_NPNC.2@-298.28,-16.004 -298.28,-15.299 -298.718,-14.861 -298.28,-14.423 R11_NPNC.2@-298.28,-13.718
NetQ15_NPNC_2: Q15_NPNC.2 R12_NPNC.2 | length 29.9
  Top Layer w0.152: R12_NPNC.2@-318.131,-23.75 -318.131,-23.853 -315.477,-26.506 -303.299,-26.506 -302.738,-25.945 -302.738,-22.051 -302.307,-21.62 -302.307,-15.023 -300.978,-13.694 -300.968,-13.684 Q15_NPNC.2@-300.95,-13.723
NetQ16_NPNA_1: Q16_NPNA.1 R13_NPNA.2 R14_NPNA.2 | length 2.9
  Top Layer w0.254: R13_NPNA.2@-366.119,-31.32 -366.119,-30.742 -366.651,-30.211 -366.684,-30.177 -366.119,-29.612 -366.119,-29.137 -366.119,-29.034 R14_NPNA.2@-366.106,-29.137
NetQ16_NPNA_2: Q16_NPNA.2 R15_NPNA.2 | length 9
  Top Layer w0.152: R15_NPNA.2@-376.318,-29.403 -376.318,-29.507 -374.858,-30.966 -370.646,-30.966 Q16_NPNA.2@-368.807,-29.127
NetQ16_NPNB_1: Q16_NPNB.1 R13_NPNB.2 R14_NPNB.2 | length 2.9
  Top Layer w0.254: R13_NPNB.2@-336.401,-28.78 -336.401,-28.202 -336.933,-27.671 -336.966,-27.637 -336.401,-27.072 -336.401,-26.597 -336.401,-26.494 R14_NPNB.2@-336.388,-26.597
NetQ16_NPNB_2: Q16_NPNB.2 R15_NPNB.2 | length 9
  Top Layer w0.152: R15_NPNB.2@-346.6,-26.863 -346.6,-26.967 -345.14,-28.426 -340.928,-28.426 Q16_NPNB.2@-339.089,-26.587
NetQ16_NPNC_1: Q16_NPNC.1 R13_NPNC.2 R14_NPNC.2 | length 2.9
  Top Layer w0.254: R13_NPNC.2@-306.662,-25.666 -306.662,-25.088 -307.194,-24.556 -307.227,-24.523 -306.662,-23.958 -306.662,-23.483 -306.662,-23.38 R14_NPNC.2@-306.649,-23.483
NetQ16_NPNC_2: Q16_NPNC.2 R15_NPNC.2 | length 9
  Top Layer w0.152: R15_NPNC.2@-316.861,-23.75 -316.861,-23.853 -315.401,-25.312 -311.189,-25.312 Q16_NPNC.2@-309.35,-23.473
NetQ17_NPNA_1: Q17_NPNA.1 R16_NPNA.2 R17_NPNA.2 | length 2.9
  Top Layer w0.254: R16_NPNA.2@-366.101,-27.703 -366.119,-27.764 -366.119,-27.186 Q17_NPNA.1@-366.684,-26.621 -366.119,-26.056 -366.119,-25.478 R17_NPNA.2@-366.101,-25.544
NetQ17_NPNA_2: Q17_NPNA.2 R18_NPNA.2 | length 10.8
  Top Layer w0.152: R18_NPNA.2@-375.048,-29.403 -375.048,-29.641 -374.032,-30.657 -374.032,-30.662 -370.985,-30.662 -369.842,-29.519 -369.842,-26.926 -368.807,-25.892 Q17_NPNA.2@-368.807,-25.51
NetQ17_NPNB_1: Q17_NPNB.1 R16_NPNB.2 R17_NPNB.2 | length 2.9
  Top Layer w0.254: R16_NPNB.2@-336.383,-25.163 -336.401,-25.224 -336.401,-24.646 Q17_NPNB.1@-336.966,-24.081 -336.401,-23.516 -336.401,-22.938 R17_NPNB.2@-336.383,-23.004
NetQ17_NPNB_2: Q17_NPNB.2 R18_NPNB.2 | length 10.8
  Top Layer w0.152: R18_NPNB.2@-345.33,-26.863 -345.33,-27.101 -344.314,-28.117 -344.314,-28.122 -341.267,-28.122 -340.124,-26.979 -340.124,-24.386 -339.089,-23.352 Q17_NPNB.2@-339.089,-22.97
NetQ17_NPNC_1: Q17_NPNC.1 R16_NPNC.2 R17_NPNC.2 | length 2.9
  Top Layer w0.254: R16_NPNC.2@-306.644,-22.049 -306.662,-22.11 -306.662,-21.532 Q17_NPNC.1@-307.227,-20.967 -306.662,-20.402 -306.662,-19.824 R17_NPNC.2@-306.644,-19.89
NetQ17_NPNC_2: Q17_NPNC.2 R18_NPNC.2 | length 10.8
  Top Layer w0.152: R18_NPNC.2@-315.591,-23.75 -315.591,-23.987 -314.575,-25.003 -314.575,-25.008 -311.528,-25.008 -310.385,-23.865 -310.385,-21.272 -309.35,-20.238 Q17_NPNC.2@-309.35,-19.856
NetQ18_NPNA_1: Q18_NPNA.1 R19_NPNA.2 R20_NPNA.2 | length 2.9
  Top Layer w0.254: R19_NPNA.2@-366.119,-24.081 -366.119,-23.503 Q18_NPNA.1@-366.684,-22.938 -366.119,-22.373 R20_NPNA.2@-366.119,-21.695
NetQ18_NPNA_2: Q18_NPNA.2 R21_NPNA.2 | length 12.2
  Top Layer w0.152: R21_NPNA.2@-373.778,-29.403 -373.778,-29.507 -372.928,-30.357 -371.619,-30.357 -370.146,-28.884 -370.146,-23.228 Q18_NPNA.2@-368.825,-21.906
NetQ18_NPNB_1: Q18_NPNB.1 R19_NPNB.2 R20_NPNB.2 | length 2.9
  Top Layer w0.254: R19_NPNB.2@-336.401,-21.541 -336.401,-20.963 Q18_NPNB.1@-336.966,-20.398 -336.401,-19.833 R20_NPNB.2@-336.401,-19.155
NetQ18_NPNB_2: Q18_NPNB.2 R21_NPNB.2 | length 12.2
  Top Layer w0.152: R21_NPNB.2@-344.06,-26.863 -344.06,-26.967 -343.21,-27.817 -341.901,-27.817 -340.428,-26.344 -340.428,-20.688 Q18_NPNB.2@-339.107,-19.366
NetQ18_NPNC_1: Q18_NPNC.1 R19_NPNC.2 R20_NPNC.2 | length 2.9
  Top Layer w0.254: R19_NPNC.2@-306.662,-18.427 -306.662,-17.849 Q18_NPNC.1@-307.227,-17.284 -306.662,-16.719 R20_NPNC.2@-306.662,-16.041
NetQ18_NPNC_2: Q18_NPNC.2 R21_NPNC.2 | length 12.2
  Top Layer w0.152: R21_NPNC.2@-314.321,-23.75 -314.321,-23.853 -313.471,-24.703 -312.162,-24.703 -310.689,-23.23 -310.689,-17.574 Q18_NPNC.2@-309.368,-16.252
NetQ19_NPNA_1: Q19_NPNA.1 R22_NPNA.2 R23_NPNA.2 | length 2.9
  Top Layer w0.254: R22_NPNA.2@-366.119,-20.525 R22_NPNA.2@-366.119,-20.261 -366.119,-19.947 -366.684,-19.382 -366.119,-18.817 R23_NPNA.2@-366.119,-18.139
NetQ19_NPNA_2: Q19_NPNA.2 R24_NPNA.2 | length 13.4
  Top Layer w0.152: R24_NPNA.2@-372.508,-29.403 -371.236,-29.403 -370.451,-28.618 -370.451,-23.055 -369.841,-22.444 -369.841,-19.169 Q19_NPNA.2@-368.916,-18.244
NetQ19_NPNB_1: Q19_NPNB.1 R22_NPNB.2 R23_NPNB.2 | length 2.9
  Top Layer w0.254: R22_NPNB.2@-336.401,-17.985 R22_NPNB.2@-336.401,-17.746 -336.401,-17.407 -336.966,-16.842 -336.401,-16.277 R23_NPNB.2@-336.401,-15.599
NetQ19_NPNB_2: Q19_NPNB.2 R24_NPNB.2 | length 12.7
  Top Layer w0.152: R24_NPNB.2@-342.79,-26.863 -340.733,-24.807 -340.759,-24.807 ; -340.759,-22.293 -340.759,-20.467 -340.045,-19.753 -340.045,-16.551 Q19_NPNB.2@-339.198,-15.704
  Top Layer w0.203: -340.759,-24.807 -340.759,-22.293
NetQ19_NPNC_1: Q19_NPNC.1 R22_NPNC.2 R23_NPNC.2 | length 2.9
  Top Layer w0.254: R22_NPNC.2@-306.662,-14.871 R22_NPNC.2@-306.662,-14.622 -306.662,-14.293 -307.227,-13.728 -306.662,-13.163 R23_NPNC.2@-306.662,-12.485
NetQ19_NPNC_2: Q19_NPNC.2 R24_NPNC.2 | length 12.6
  Top Layer w0.152: R24_NPNC.2@-313.051,-23.75 -310.994,-21.693 -310.994,-17.167 -310.532,-16.705 -310.532,-13.663 Q19_NPNC.2@-309.459,-12.59
NetQ20_IO1_2: Q20_IO1.2 R65_IO1.1 | length 7.8
  Top Layer w0.254: R65_IO1.1@-269.963,46.656 -269.963,49.772 -268.876,50.859 -267.05,50.859 Q20_IO1.2@-266.143,51.766
NetQ20_IO2_2: Q20_IO2.2 R65_IO2.1 | length 33.2
  Top Layer w0.203: R65_IO2.1@-256.164,56.828 -256.164,66.874 -253.287,69.751 -237.126,69.751 -235.3,71.577 -235.3,71.941 Q20_IO2.2@-235.282,71.959
NetR25_1: R25.1 U1.15 | length 16.4
  Top Layer w0.254: U1.15@-398.975,-23.62 -398.975,-23.105 -398.163,-22.293 -396.747,-22.293 v1(-396.363,-22.677) ; v1(-389.526,-25.595) -386.744,-25.595 R25.1@-385.335,-27.004
  Bottom Layer w0.254: v1(-396.363,-22.677) -393.445,-25.595 v1(-389.526,-25.595)
NetR26_1: R26.1 U1.14 | length 12.9
  Top Layer w0.254: U1.14@-400.245,-23.62 -400.245,-24.731 -399.94,-25.036 -397.618,-25.036 -396.965,-25.689 -390.611,-25.689 -389.526,-26.775 R26.1@-389.526,-27.004
NetR27_1: R27.1 U1.13 | length 10.3
  Top Layer w0.152: -395.749,-26.103 -394.206,-26.103 -393.463,-26.846 R27.1@-393.463,-27.004
  Top Layer w0.254: U1.13@-401.515,-23.62 -401.515,-24.845 -400.918,-25.442 -398.157,-25.442 -397.497,-26.103 -395.749,-26.103
NetR28_1: R28.1 U1.12 | length 7.4
  Top Layer w0.254: U1.12@-402.785,-23.62 -402.785,-24.401 -401.337,-25.849 -398.326,-25.849 -397.4,-26.775 R28.1@-397.4,-27.004
NetR29_1: R29.1 U1.11 | length 5.1
  Top Layer w0.254: U1.11@-404.055,-23.62 -404.055,-25.103 -403.563,-25.595 -402.517,-25.595 -401.337,-26.775 R29.1@-401.337,-27.004
NetR30_1: R30.1 U1.10 | length 3.4
  Top Layer w0.254: U1.10@-405.325,-23.62 -405.325,-26.953 R30.1@-405.274,-27.004
NetR31_1: R31.1 U1.9 | length 5.3
  Top Layer w0.203: R31.1@-409.211,-27.004 -409.1,-27.004 -408.191,-26.095 -406.798,-26.095 -406.595,-25.892 U1.9@-406.595,-23.62
NetR32_1: R32.1 U1.7 | length 17.3
  Top Layer w0.203: R32.1@-413.148,-27.004 -412.544,-26.4 -412.003,-26.4 -410.055,-24.452 -410.055,-22.805 -409.639,-22.389 -409.099,-22.389 -407.565,-20.856 -407.565,-16.487 -407.402,-16.324 -405.528,-16.324 -405.325,-16.527 U1.7@-405.325,-18.02
NetR33_1: R33.1 U8.15 | length 8.4
  Top Layer w0.152: R33.1@-417.085,-27.004 -417.025,-27.004 -416.091,-26.07 -412.208,-26.07 -410.659,-24.52 U8.15@-410.659,-23.543
NetR34_1: R34.1 U8.14 | length 11.4
  Top Layer w0.152: R34.1@-421.022,-27.004 -420.875,-27.004 -419.96,-26.089 -416.541,-26.089 -416.206,-25.754 -412.672,-25.754 -411.929,-25.011 U8.14@-411.929,-23.543
NetR35_1: R35.1 U8.13 | length 14
  Top Layer w0.152: R35.1@-424.959,-27.004 -424.812,-27.004 -423.589,-25.781 -416.664,-25.781 -416.333,-25.449 -413.798,-25.449 -413.199,-24.85 U8.13@-413.199,-23.543
NetR60_IO1_1: R60_IO1.1 U7_IO1.6 | length 1.8
  Top Layer w0.254: U7_IO1.6@-277.385,65.845 -277.385,65.349 R60_IO1.1@-276.484,64.448
NetR60_IO2_1: R60_IO2.1 U7_IO2.6 | length 12.5
  Top Layer w0.508: R60_IO2.1@-233.824,51.252 -232.82,51.252 -230.395,48.827 -227.982,48.827 -227.22,49.589 -227.22,54.01 -227.244,54.034 U7_IO2.6@-227.093,54.034
NetR62_1: R62.1 U9.9 | length 3.8
  Top Layer w0.254: R62.1@-269.142,40.699 -269.142,40.076 -268.876,39.81 -267.606,39.81 -266.844,40.572 U9.9@-266.844,41.074
NetR80_1: R80.1 U10.9 | length 1.6
  Top Layer w0.254: R80.1@-245.63,28.253 -245.63,26.85 U10.9@-245.515,26.735
NetR81_2: R81.2 U11.11 | length 1.8
  Top Layer w0.381: R81.2@-254.652,51.863 -254.652,51.901 -253.019,51.901 U11.11@-252.92,52
NetR92_1: R92.1 U8.12 | length 18.2
  Top Layer w0.152: R92.1@-426.986,-30.988 -426.956,-30.988 -426.103,-30.135 -426.103,-27.024 -424.555,-25.476 -416.791,-25.476 -416.459,-25.144 -414.782,-25.144 -414.469,-24.831 U8.12@-414.469,-23.543
NetR93_1: R93.1 U8.11 | length 12.9
  Top Layer w0.152: R93.1@-426.986,-26.924 -426.433,-26.924 -424.681,-25.171 -416.917,-25.171 -415.739,-23.993 U8.11@-415.739,-23.543
NetR94_1: R94.1 U8.10 | length 11.9
  Top Layer w0.152: R94.1@-426.986,-22.86 -424.979,-24.867 -417.44,-24.867 -417.009,-24.435 U8.10@-417.009,-23.543
NetR95_1: R95.1 U8.9 | length 13
  Top Layer w0.203: R95.1@-426.986,-18.796 -426.811,-18.796 -425.661,-19.946 -425.661,-22.649 -423.926,-24.384 -419.119,-24.384 U8.9@-418.279,-23.543
NetR96_1: R96.1 U8.7 | length 21.9
  Top Layer w0.203: R96.1@-426.986,-14.732 -426.986,-14.843 -426.077,-15.752 -426.077,-19.027 -425.305,-19.799 -425.305,-22.502 -423.814,-23.993 -419.552,-23.993 -419.163,-23.604 -419.163,-22.492 -417.009,-20.337 U8.7@-417.009,-17.943
NetU2_9: U2.9 U3.14 | length 30.7
  Top Layer w0.203: U2.9@-371.238,-20.919 -371.238,-17.594 -369.079,-15.435 -347.997,-15.435 -347.859,-15.573 U3.14@-347.859,-18.647
NetU3_9: U3.9 U4.14 | length 31
  Top Layer w0.152: U3.9@-341.509,-18.647 -341.509,-15.424 -338.345,-12.26 -318.131,-12.26 -318.131,-15.373 U4.14@-318.123,-15.381
PGCLK: P4.3 R74.1 | length 17.2
  Top Layer w0.254: v1(-270.146,54.034) -269.916,54.034 R74.1@-269.003,53.121
  Bottom Layer w0.203: P4.3@-278.274,62.289 -278.274,55.177 -277.685,54.588 -271.567,54.588 -271.013,54.034 v1(-270.146,54.034)
PGDAT: P4.2 R76.1 | length 16.9
  Top Layer w0.203: R76.1@-271.797,53.108 v1(-271.797,54.034)
  Bottom Layer w0.203: P4.2@-280.814,62.289 -279.036,60.511 -279.036,54.542 -278.528,54.034 v1(-271.797,54.034)
RD: P1.22 R78.1 | length 5.6
  Top Layer w0.254: R78.1@-288.321,31.105 -288.288,31.138 v1(-288.288,32.905)
  Bottom Layer w0.254: v1(-288.288,32.905) -285.64,35.553 P1.22@-285.64,35.619
RX1: R61_IO1.1 U6.22 U7_IO1.5 | length 41.4
  Top Layer w0.254: R61_IO1.1@-285.513,63.601 -285.513,63.698 -282.005,63.698 -279.925,65.778 U7_IO1.5@-279.925,65.845 -279.804,65.845 -276.963,63.004 -276.963,61.273 -276.074,60.384 -271.653,60.384 -271.303,60.034 -271.303,59.222 -271.69,58.835 -278.731,58.835 -279.781,57.785 -279.781,51.308 -279.496,51.023 -276.225,51.023 -275.373,51.875 U6.22@-273.851,51.875
RX2: R61_IO2.1 U6.21 U7_IO2.5 U11.1 | length 68.6
  Top Layer w0.203: R61_IO2.1@-256.164,54.542 -256.164,55.401 -255.414,56.151 -255.414,65.603 -254.017,67 U11.1@-252.92,67
  Top Layer w0.254: U6.21@-273.851,50.605 v1(-271.763,50.605) ; v1(-262.78,53.551) -256.786,53.551 R61_IO2.1@-256.176,54.161
  Top Layer w0.508: U11.1@-252.92,67 -251.154,68.766 -235.964,68.766 -235.132,67.934 -235.132,59.6 -229.633,54.1 U7_IO2.5@-229.633,54.034
  Bottom Layer w0.254: v1(-271.763,50.605) -269.638,50.605 -266.692,53.551 v1(-262.78,53.551)